# Altium PCB PCB.PcbDoc (part 8 of 11)
Units mm, origin at the board's own origin, x right, y up, seen from the top; angles counter-clockwise.
Board outline 100.46 x 70.51 mm, 10 copper layers (L1(SIG), L2(GND), L3(PWR), L4(SIG), L5(GND), L6(SIG), L7(GND), L8(SIG), L9(GND), L10(SIG)), stack 1.49 mm thick; 425 components, 324 nets, 2004 pads, 1425 vias.
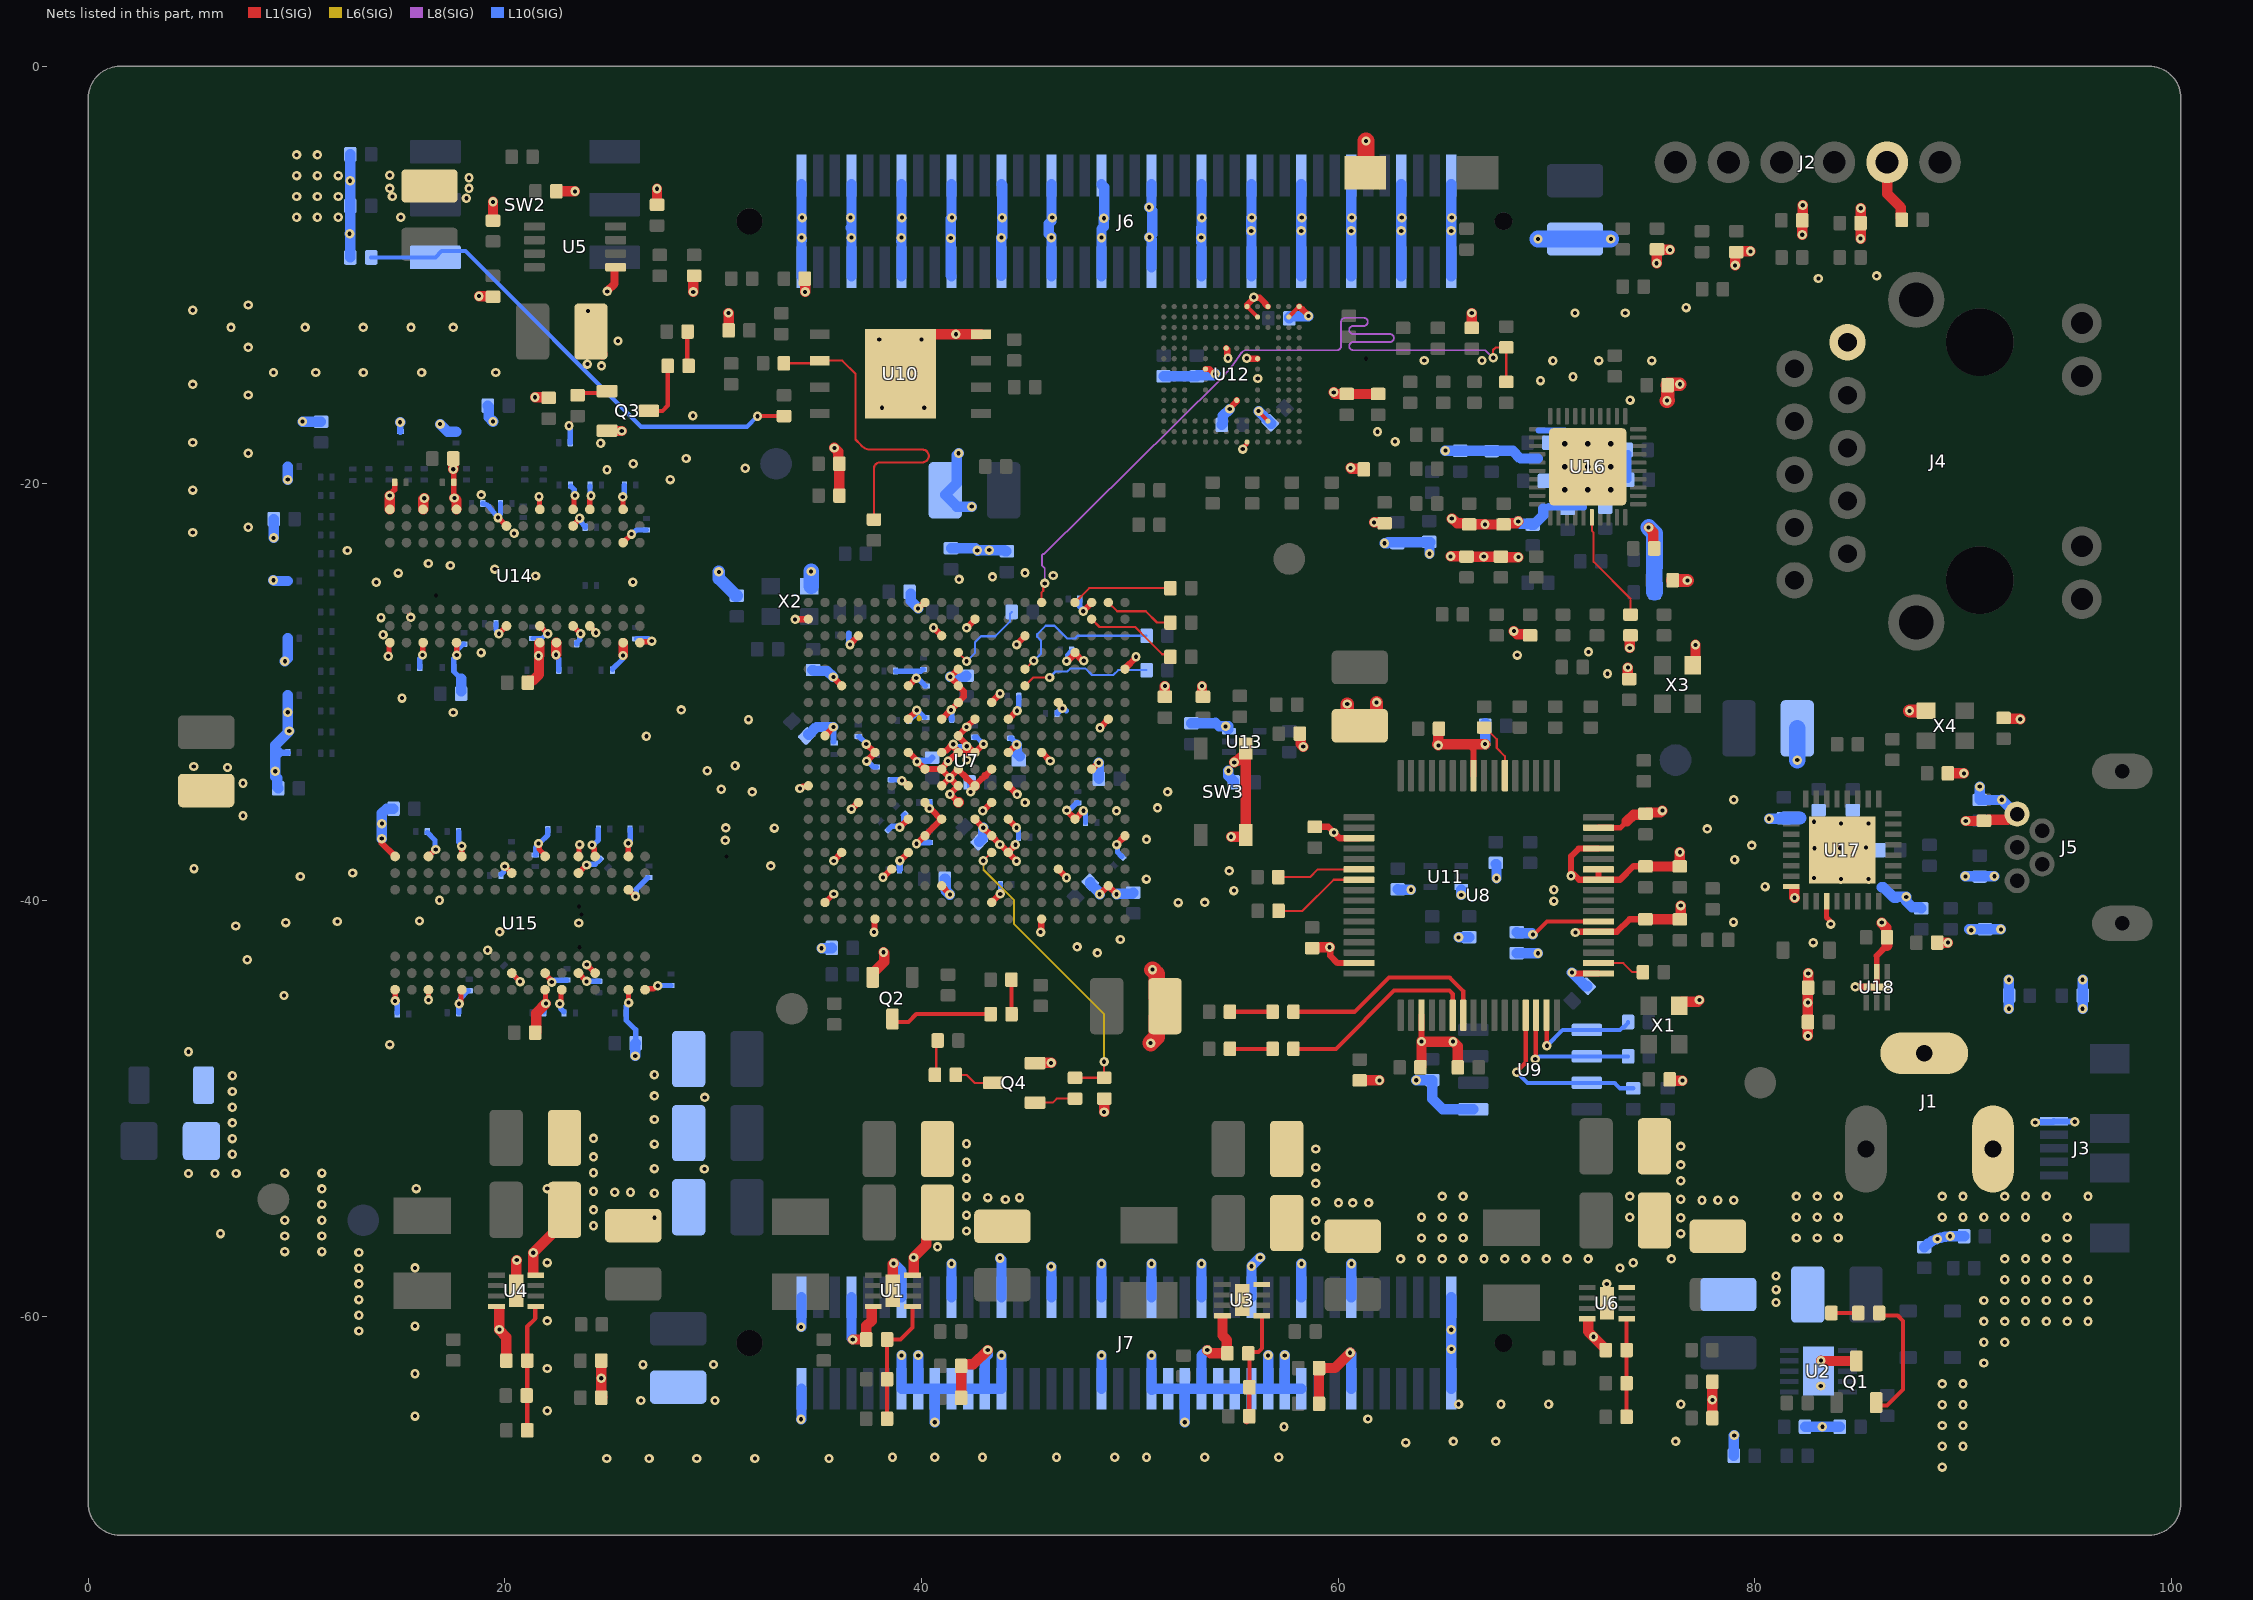
[diagram p15: the nets of this part, all layers, seen from the top]

## Via types
v1: diameter 0.45, hole 0.2, L1(SIG) to L10(SIG), tented both sides, 1194 vias
v2: diameter 0.45, hole 0.2, L1(SIG) to L10(SIG), 211 vias
v3: diameter 0.6, hole 0.25, L1(SIG) to L10(SIG), 9 vias
v4: diameter 0, hole 0.2, L1(SIG) to L10(SIG), tented both sides, 6 vias
v5: diameter 5, hole 3.2, L1(SIG) to L10(SIG), tented both sides, 4 vias
v6: diameter 0.45/0.45/0.45/0.45/0.45/0.45/0.45/0.45/0.45/0.45 (per signal layer), hole 0.2, L1(SIG) to L10(SIG), tented both sides, 1 vias

## Nets (pads, with @x,y where several pads share a name; then routed paths per layer and width w, separated by ;. In a path a pad name is that pad's centre, name@x,y a point inside that pad or via, vN(x,y) a via of type N, cw(c..) or ccw(c..) an arc to the next point about the centre after c; other vN are vias at no path point) (continued)
ETH_RXD3: R132.1 R136.2 U7.A15 | length 39.4
  L1(SIG) w0.103: U7.A15@45.77,-25.71 45.77,-25.224 45.849,-25.145 45.849,-24.859 v1(45.915,-24.793) ; v1(67.447,-13.962) 67.437,-13.952 67.437,-13.593 67.564,-13.466 R132.1@68.072,-13.466 R136.2@68.072,-15.125
  L8(SIG) w0.088: v1(45.915,-24.793) 45.915,-24.067 45.79,-23.942 45.79,-23.429 45.842,-23.377 45.852,-23.377 45.889,-23.377 54.362,-14.998 ccw(c54.102,-14.736) 54.382,-14.976 54.94,-14.326 54.945,-14.32 55.314,-13.778 cw(c55.619,-13.986) 55.381,-13.703 55.506,-13.598 59.907,-13.598 59.951,-13.598 ccw(c59.951,-13.404) 60.145,-13.404 60.145,-12.239 cw(c60.339,-12.239) 60.339,-12.045 61.233,-12.045 cw(c61.233,-12.239) 61.427,-12.239 cw(c61.233,-12.239) 61.233,-12.433 60.727,-12.433 ccw(c60.727,-12.627) 60.533,-12.627 ccw(c60.727,-12.627) 60.727,-12.821 62.484,-12.821 cw(c62.484,-13.016) 62.678,-13.016 cw(c62.484,-13.016) 62.484,-13.21 60.727,-13.21 ccw(c60.727,-13.404) 60.533,-13.404 ccw(c60.727,-13.404) 60.727,-13.598 63.971,-13.598 67.061,-13.598 67.425,-13.962 v1(67.447,-13.962)
ETH_TXCLK: R79.2 U7.A19 | length 3.4
  L1(SIG) w0.103: U7.A19@48.97,-25.71 49.393,-26.133 50.767,-26.133 51.308,-26.674 R79.2@51.951,-26.674
ETH_TXCLT: R85.2 U7.F14 | length 6.4
  L1(SIG) w0.103: U7.F14@44.97,-29.71 44.973,-29.71 45.371,-29.312 v1(46.15,-29.312)
  L10(SIG) w0.103: v1(46.15,-29.312) 46.435,-29.027 47.001,-29.027 47.142,-28.886 47.881,-28.886 48.184,-29.189 49.21,-29.189 49.439,-28.96 R85.2@50.808,-28.96
ETH_TXD0: R80.2 U7.E14 | length 7.8
  L1(SIG) w0.103: U7.E14@44.97,-28.91 44.981,-28.91 45.381,-28.51 v1(45.393,-28.51)
  L10(SIG) w0.103: v1(45.393,-28.51) 45.736,-28.166 45.736,-27.541 45.556,-27.361 45.556,-27.236 45.964,-26.828 46.389,-26.828 46.997,-27.436 47.367,-27.436 47.495,-27.309 R80.2@50.808,-27.309
ETH_TXD1: R81.2 U7.B18 | length 4.5
  L1(SIG) w0.103: U7.B18@48.17,-26.51 48.547,-26.886 50.26,-26.886 50.546,-27.172 50.546,-27.182 51.556,-28.192 51.818,-28.192 R81.2@51.951,-28.325
ETH_TXD2: R83.2 U7.D10 | length 4.2
  L1(SIG) w0.103: U7.D10@41.77,-28.11 41.77,-28.121 42.17,-28.521 v1(42.17,-28.532)
  L10(SIG) w0.103: v1(42.17,-28.532) 42.578,-28.124 42.578,-27.611 42.861,-27.328 43.54,-27.328 44.258,-26.61 44.258,-26.243 R83.2@44.336,-26.166
ETH_TXD3: R84.2 U7.A17 | length 4.9
  L1(SIG) w0.103: U7.A17@47.37,-25.71 48.057,-25.023 R84.2@51.951,-25.023
ETH_XTAL_IN: R147.1 U16.36 | length 5.7
  L1(SIG) w0.1: U16.36@72.186,-21.92 U16.36@72.186,-21.62 72.186,-22.274 72.267,-22.356 72.267,-23.76 74.039,-25.531 R147.1@74.039,-26.292
FB_1V0: C2.1 R2.1 R4.2 U1.1 | length 6.3
  L1(SIG) w0.2: R2.1@38.346,-64.951 R4.2@38.346,-61.091 38.989,-61.091 39.57,-60.509 U1.1@39.57,-59.504
FB_1V8: C11.1 R10.1 R12.2 U3.1 | length 5.7
  L1(SIG) w0.2: R10.1@55.618,-65.076 R10.1@55.618,-64.774 ; R12.2@55.689,-61.756 55.758,-61.687 56.172,-61.687 56.344,-61.516 U3.1@56.344,-59.949 ; R10.1@55.737,-64.774 C11.1@55.737,-63.385 ; C11.1@55.745,-63.377 R12.2@55.745,-61.726
FB_1V35: C16.1 R15.1 R18.2 U4.1 | length 6.1
  L1(SIG) w0.2: C16.1@21.074,-65.45 21.074,-60.464 21.463,-60.075 21.463,-59.528 U4.1@21.487,-59.504
FB_3V3: C27.1 R23.1 R27.2 U6.1 | length 4.7
  L1(SIG) w0.2: C27.1@73.849,-64.807 73.849,-60.105 U6.1@73.857,-60.097
FET_PL_Gate: Q4.G R99.1 | length 2
  L1(SIG) w0.1: Q4.G@45.45,-49.722 46.294,-49.722 46.49,-49.526 R99.1@47.371,-49.526
FET_PS_Gate: Q3.G R82.1 | length 1.5
  L1(SIG) w0.2: R82.1@23.495,-15.76 23.593,-15.662 24.81,-15.662 Q3.G@24.908,-15.564
FLASH_CLK_M4: R59.1 R74.1 U10.6 | length 16.4
  L1(SIG) w0.103: R59.1@33.52,-14.101 R59.1@33.393,-14.228 34.992,-14.228 U10.6@35.119,-14.101 36.195,-14.101 36.83,-14.736 36.83,-17.887 37.109,-18.166 37.161,-18.218 37.162,-18.219 ccw(c37.529,-17.849) 37.164,-18.221 ccw(c37.53,-17.849) 37.53,-18.371 40.049,-18.371 cw(c40.049,-18.677) 40.354,-18.677 cw(c40.049,-18.677) 40.049,-18.982 38.025,-18.982 ccw(c38.025,-19.288) 37.719,-19.288 37.719,-21.448 R74.1@37.719,-21.729
FTDI_BDBUS0: R47.1 U8.38 | length 4
  L1(SIG) w0.1: R47.1@57.134,-38.892 58.659,-38.892 59.028,-38.523 U8.38@61.006,-38.523
FTDI_BDBUS1: R49.1 U8.39 | length 4.5
  L1(SIG) w0.1: R49.1@57.142,-40.517 58.293,-40.517 59.787,-39.023 U8.39@61.006,-39.023
FTDI_BDBUS5: R44.1 U8.22 | length 2.8
  L1(SIG) w0.1: R44.1@67.01,-31.712 67.06,-31.712 67.617,-32.269 67.617,-32.695 68.006,-33.084 U8.22@68.006,-34.023
FTDI_EECLK: R54.1 U8.62 U9.2 | length 6.6
  L1(SIG) w0.2: v1(69.469,-47.629) 69.487,-47.61 69.487,-45.541 U8.62@69.506,-45.523
  L10(SIG) w0.2: v1(69.469,-47.629) 69.537,-47.629 69.664,-47.502 U9.2@71.94,-47.502 R54.1@73.922,-47.502
FTDI_EECS: R55.1 U8.63 U9.1 | length 5.9
  L1(SIG) w0.2: U8.63@70.006,-45.523 70.016,-45.533 70.016,-46.979 v1(70.026,-46.989)
  L10(SIG) w0.2: v1(70.026,-46.989) 70.783,-46.232 U9.1@71.94,-46.232 73.541,-46.232 73.672,-46.101 73.722,-46.101 73.922,-45.901 R55.1@73.922,-45.851
FTDI_EEDATA: R53.1 U8.61 U9.3 | length 8.8
  L1(SIG) w0.2: v1(68.58,-48.264) 68.58,-48.231 69.006,-47.806 U8.61@69.006,-45.523
  L10(SIG) w0.2: v1(68.58,-48.264) 69.088,-48.772 U9.3@71.94,-48.772 73.279,-48.772 73.541,-49.034 R53.1@74.168,-49.034
FTDI_OSCI: R62.2 U8.2 | length 2.5
  L1(SIG) w0.1: U8.2@72.506,-43.023 73.689,-43.023 74.122,-43.456 R62.2@74.517,-43.456 ; R62.2@74.517,-43.583 74.765,-43.335 R62.2@74.765,-43.329
FTDI_REF: R48.2 U8.6 | length 4.2
  L1(SIG) w0.2: v1(69.353,-41.648) 69.407,-41.648 70.032,-41.023 U8.6@72.506,-41.023
  L10(SIG) w0.5: R48.2@68.58,-41.541 68.63,-41.591 69.296,-41.591 v1(69.353,-41.648)
FTDI_RX_LED_A: D11.A R52.2 | length 2
  L1(SIG) w0.2: R52.2@54.81,-47.139 D11.A@56.858,-47.139
FTDI_RX_LED_K: D11.K U8.54 | length 9.9
  L1(SIG) w0.2: D11.K@57.858,-47.139 59.898,-47.139 62.692,-44.345 65.345,-44.345 65.506,-44.505 U8.54@65.506,-45.523
FTDI_TX_LED_A: D12.A R51.2 | length 2.1
  L1(SIG) w0.2: R51.2@54.81,-45.361 D12.A@56.866,-45.361
FTDI_TX_LED_K: D12.K U8.55 | length 10.3
  L1(SIG) w0.2: D12.K@57.866,-45.361 60.787,-45.361 62.438,-43.71 65.359,-43.71 66.006,-44.357 U8.55@66.006,-45.523
GND: C1.1 C3.1 C4.1 C5.1 C6.1 C7.1 C8.1 C9.1 C10.1 C12.1 C13.1 C14.1 C15.1 C17.1 C18.1 C19.1 C20.1 C21.1 C22.1 C23.1 C24.1 C25.1 C26.1 C28.1 C29.1 C30.1 C31.2 C32.1 C33.1 C34.1 C35.1 C36.1 C37.1 C38.1 C39.1 C40.1 C41.1 C42.1 C43.1 C44.1 C45.1 C46.1 C47.1 C48.1 C49.1 C50.1 C51.1 C52.1 C53.1 C54.1 C55.1 C56.1 C57.1 C58.1 C59.1 C60.1 C61.1 C62.1 C63.1 C64.1 C65.1 C66.1 C67.1 C68.1 C69.1 C70.1 C71.1 C72.1 C73.1 C74.1 C75.1 C76.1 C77.1 C78.1 C79.1 C80.1 C81.1 C82.1 C83.1 C84.1 C85.1 C86.1 C87.1 C88.1 C89.1 C90.1 C91.1 C92.1 C93.1 C94.1 C95.1 C96.1 C97.1 C98.1 C99.2 C100.1 C101.2 C102.2 C103.2 C104.2 C105.2 C106.2 C107.2 C108.2 C109.2 C110.1 C111.2 C112.2 C113.1 C114.1 C115.1 C116.1 C117.1 C118.1 C119.1 C120.1 C121.1 C122.1 C123.1 C124.1 C125.1 C126.1 C128.1 C129.1 C130.1 C131.1 C132.1 C133.1 C134.1 C135.1 C136.1 C137.1 C138.1 C139.1 C140.1 C141.1 C142.1 C143.1 C144.1 C145.1 C146.1 C147.1 C148.1 C150.1 C151.1 C152.1 C153.1 C154.1 C155.1 C156.1 C157.1 C158.1 C159.1 C160.1 C161.1 C162.1 C163.1 C164.1 C165.1 C166.1 C167.1 C168.1 C169.1 C170.1 C171.1 C172.1 C173.1 C174.1 C175.1 C176.1 C177.1 C178.1 C179.1 C180.1 C181.1 C182.1 C183.1 C184.1 C185.1 C186.1 C187.1 C188.1 C189.1 C190.1 C191.1 C192.1 C193.1 C194.1 C195.1 C196.1 C197.1 C198.1 C199.1 D3.A D4.A D5.A D6.A D9.A D10.A D16.A D17.A D18.A J1.2 J1.3 J2.5 J3.5 J4.10 J5.5 J6.1 J6.2 J6.7 J6.8 J6.13 J6.14 J6.19 J6.20 J6.25 J6.26 J6.31 J6.32 J6.37 J6.38 J6.43 J6.44 J6.49 J6.50 J6.55 J6.56 J6.61 J6.62 J6.67 J6.68 J6.73 J6.74 J6.79 J6.80 J7.1 J7.2 J7.13 J7.14 J7.19 J7.20 J7.22 J7.24 J7.25 J7.26 J7.28 J7.30 J7.31 J7.32 J7.34 J7.36 J7.37 J7.38 J7.43 J7.44 J7.49 J7.55 J7.56 J7.58 J7.60 J7.61 J7.62 J7.64 J7.66 J7.67 J7.68 J7.73 J7.79 J7.80 Q1.D Q2.S Q3.S Q4.S R4.1 R6.1 R8.1 R12.1 R13.1 R18.1 R19.1 R21.1 R27.1 R28.2 R29.1 R46.1 R48.1 R60.2 R61.2 R66.2 R67.2 R68.2 R75.1 R76.1 R92.2 R96.2 R100.2 R125.2 R127.2 R128.2 R139.1 R140.1 R141.1 R147.2 R150.2 R151.2 R155.2 R157.2 R158.2 R159.2 SW1.2 SW3.12 U1.4 U1.8 U1.9 U2.11 U3.4 U3.8 U3.9 U4.4 U4.8 U4.9 U5.1 U6.4 U6.8 U6.9 U7.A8 U7.A18 U7.B1 U7.B11 U7.C4 U7.C9 U7.C14 U7.D17 U7.E10 U7.E20 U7.F3 U7.F7 U7.F10 U7.G10 U7.G12 U7.G16 U7.H7 U7.H9 U7.H11 U7.H13 U7.H19 U7.J2 U7.J10 U7.K5 U7.K7 U7.K9 U7.K10 U7.K11 U7.K13 U7.K15 U7.L8 U7.L9 U7.L10 U7.L12 U7.L18 U7.M1 U7.M7 U7.M9 U7.M10 U7.M11 U7.M13 U7.N4 U7.N8 U7.N10 U7.N12 U7.N14 U7.P7 U7.P9 U7.P11 U7.P13 U7.P17 U7.R8 U7.R12 U7.R20 U7.T3 U7.T7 U7.T13 U7.U6 U7.U16 U7.V9 U7.V19 U7.W2 U7.W12 U7.Y5 U7.Y15 U8.1 U8.5 U8.10 U8.11 U8.13 U8.15 U8.25 U8.35 U8.47 U8.51 U9.5 U10.4 U10.9 U11.3 U12.A6 U12.C4 U12.E7 U12.G5 U12.H10 U12.J5 U12.K8 U12.N2 U12.N5 U12.P1 U12.P4 U12.P6 U13.3 U14.A9 U14.B1 U14.B3 U14.B9 U14.D1 U14.D8 U14.E1 U14.E2 U14.E8 U14.F9 U14.G1 U14.G8 U14.G9 U14.J2 U14.J8 U14.M1 U14.M9 U14.P1 U14.P9 U14.T1 U14.T9 U15.A9 U15.B1 U15.B3 U15.B9 U15.D1 U15.D8 U15.E1 U15.E2 U15.E8 U15.F9 U15.G1 U15.G8 U15.G9 U15.J2 U15.J8 U15.M1 U15.M9 U15.P1 U15.P9 U15.T1 U15.T9 U16.41 U17.8 U17.11 U17.33 U18.5 U18.7 X1.2 X2.2 X3.2 X4.2 | length 492.3
  L1(SIG) w0.2: v1(55.424,-18.35) 55.424,-18.293 55.624,-18.092 55.624,-18.015 U12.A6@55.634,-18.006 ; U12.P6@55.634,-11.506 U12.N5@56.134,-12.006 ; v1(56.184,-16.523) 56.184,-16.542 56.634,-16.992 U12.C4@56.634,-17.006 ; U12.N2@57.634,-12.006 U12.P1@58.134,-11.506
  L1(SIG) w0.254: v1(14.4,-28.294) 14.438,-28.257 14.438,-27.68 U14.T9@14.479,-27.639 ; v1(14.478,-20.578) 14.478,-20.525 14.709,-20.294 C136.1@14.709,-19.991 ; U15.T1@14.692,-37.859 U15.T1@14.733,-37.901 ; v1@14.733,-44.834 U15.T9@14.733,-44.301 ; v1(16.049,-28.23) 16.064,-28.216 16.064,-27.653 U14.P9@16.079,-27.639 ; v1(16.333,-44.789) U15.P9@16.333,-44.301 ; U15.P1@16.333,-37.901 16.341,-37.901 16.676,-37.566 v1(16.684,-37.566) ; v1(17.526,-19.314) 17.547,-19.335 C132.1@17.547,-19.943 17.547,-20.664 v1(17.578,-20.694) ; U14.M9@17.679,-27.639 17.686,-27.646 17.686,-28.23 v1(17.693,-28.237) ; v1(17.805,-44.971) 17.805,-44.918 17.892,-44.832 17.892,-44.342 U15.M9@17.933,-44.301 ; U15.M1@17.934,-37.9 v1(17.934,-37.406) ; v1(19.671,-21.639) 19.675,-21.639 20.075,-22.039 U14.J2@20.079,-22.039 ; v1(19.716,-27.212) 19.716,-27.207 20.079,-26.844 U14.J8@20.079,-26.839 ; v1(19.993,-38.381) 20.003,-38.381 20.323,-38.701 U15.J2@20.333,-38.701 ; U15.J8@20.333,-43.501 20.333,-43.505 20.733,-43.905 v1(20.733,-43.909) ; v1(21.615,-37.28) 21.653,-37.317 21.653,-37.562 21.933,-37.842 U15.G1@21.933,-37.901 ; v1(21.642,-20.63) 21.661,-20.648 21.661,-21.22 U14.G1@21.679,-21.239 ; U14.G9@21.647,-27.671 U14.G9@21.679,-27.639 ; U14.G8@21.679,-26.839 21.684,-26.839 22.055,-27.21 v1(22.06,-27.21) ; U15.G9@21.933,-44.301 21.952,-44.32 21.952,-44.943 v1(21.971,-44.962) ; U15.G8@21.933,-43.501 21.933,-43.559 22.216,-43.842 22.216,-43.897 v1(22.253,-43.935) ; v1(22.457,-28.218) v1@22.468,-28.207 ; U14.F9@22.468,-27.65 U14.F9@22.479,-27.639 ; v1(22.635,-44.971) 22.635,-44.918 22.692,-44.862 22.692,-44.342 U15.F9@22.733,-44.301 ; U14.E8@23.279,-26.839 23.279,-26.844 23.639,-27.204 v1(23.639,-27.21) ; U14.E2@23.279,-22.039 23.279,-22.006 23.589,-21.696 v1(23.589,-21.663) ; U14.E1@23.279,-21.239 23.32,-21.197 23.32,-20.677 23.37,-20.627 v1(23.37,-20.574) ; U15.E8@23.533,-43.501 23.533,-43.505 23.926,-43.898 v1(23.926,-43.902) ; U15.E2@23.534,-38.701 v1(23.924,-38.311) ; U15.E1@23.533,-37.901 23.562,-37.872 23.562,-37.363 v1(23.591,-37.334) ; v1(23.929,-43.097) U15.D8@24.333,-43.501 ; U14.D8@24.079,-26.839 24.079,-26.854 24.371,-27.146 v1(24.371,-27.161) ; U14.D1@24.079,-21.239 24.079,-20.693 24.135,-20.637 v1(24.135,-20.584) ; v1(24.181,-37.353) 24.181,-37.406 24.292,-37.517 24.292,-37.859 U15.D1@24.333,-37.901 ; v1(25.664,-20.64) 25.671,-20.648 25.671,-21.231 U14.B1@25.679,-21.239 ; v1(25.675,-28.255) v1@25.677,-28.253 ; U14.B9@25.677,-27.641 U14.B9@25.679,-27.639 ; U14.B3@25.679,-22.839 25.679,-22.835 26.079,-22.435 v1(26.079,-22.431) ; v1(25.923,-37.269) 25.928,-37.274 25.928,-37.896 U15.B1@25.933,-37.901 ; U15.B9@25.933,-44.301 25.938,-44.306 25.938,-44.912 v1(25.943,-44.917) ; U15.B3@25.933,-39.501 25.943,-39.501 26.264,-39.821 v1(26.274,-39.821) ; U14.A9@26.479,-27.639 26.517,-27.6 27.013,-27.6 v1(27.051,-27.563) ; U15.A9@26.733,-44.301 26.774,-44.259 27.14,-44.259 27.29,-44.11 v1(27.343,-44.11) ; U7.W2@35.37,-40.11 35.378,-40.11 35.781,-39.707 v1(35.789,-39.707) ; U8.15@73.106,-36.523 73.562,-36.523 73.868,-36.217 ; U17.33@82.844,-38.953 v1(82.844,-38.936) ; U17.11@83.451,-40.046 83.451,-40.827 83.615,-40.991 83.615,-41.113 v1(83.653,-41.15) ; U17.33@83.451,-38.346 U17.33@84.201,-37.596 ; U18.7@85.86,-44.178 U18.5@85.86,-43.438 85.86,-42.668
  L1(SIG) w0.3: v1(33.936,-26.52) 33.941,-26.515 34.565,-26.515 U7.B1@34.57,-26.51 ; v1(34.164,-34.638) 34.205,-34.638 34.304,-34.538 34.541,-34.538 U7.M1@34.57,-34.51 ; U7.J2@35.37,-32.11 35.37,-32.098 35.77,-31.698 v1(35.77,-31.687) ; v1(35.77,-29.287) 35.77,-29.298 U7.F3@36.17,-29.698 ; v1(35.786,-38.116) 35.786,-38.105 36.179,-37.711 U7.T3@36.179,-37.71 ; v1(36.57,-27.732) 36.57,-27.721 36.974,-27.317 U7.C4@36.974,-27.298 ; v1(36.634,-35.632) 36.641,-35.632 36.959,-35.314 U7.N4@36.959,-35.31 ; v1(37.347,-32.51) 37.359,-32.51 37.759,-32.91 U7.K5@37.77,-32.91 ; v1(37.365,-33.327) 37.365,-33.321 37.727,-32.959 U7.K5@37.727,-32.908 ; v1(37.719,-41.533) 37.745,-41.507 37.745,-40.935 U7.Y5@37.77,-40.91 ; v1@38.163,-38.905 U7.U6@38.559,-38.51 ; v1(38.964,-38.104) 38.97,-38.104 39.359,-37.715 U7.T7@39.359,-37.71 ; v1@38.963,-36.505 U7.P7@39.359,-36.11 ; v1(39.06,-34.26) 39.091,-34.26 39.34,-34.51 U7.M7@39.381,-34.51 ; U7.H7@39.345,-31.31 U7.H7@39.37,-31.31 ; U7.K7@39.37,-32.91 39.381,-32.91 39.763,-33.292 v1@39.775,-33.292 ; U7.H7@39.37,-31.295 39.374,-31.295 39.77,-30.898 v1(39.77,-30.887) ; U7.F7@39.37,-29.698 39.387,-29.698 39.745,-29.341 v1(39.751,-29.341) ; v1(39.763,-37.294) U7.R8@40.159,-36.898 ; v1@39.775,-33.303 v1@39.802,-33.331 ; v1(39.785,-33.348) 39.797,-33.348 40.147,-33.698 U7.L8@40.17,-33.698 ; v1(39.841,-25.994) 39.863,-25.994 40.14,-25.717 U7.A8@40.159,-25.717 ; U7.R8@40.17,-36.91 40.17,-36.898 40.552,-36.516 40.552,-36.505 ; U7.N8@40.17,-35.31 40.17,-35.35 40.35,-35.53 40.35,-35.572 v1(40.379,-35.601) ; U7.L8@40.17,-33.71 U7.L9@40.97,-33.71 ; v1@40.414,-35.566 40.414,-35.595 v1@40.485,-35.666 ; v1@40.486,-35.666 40.929,-36.11 U7.P9@40.959,-36.11 ; 40.563,-36.505 U7.P9@40.959,-36.11 ; v1(40.58,-26.926) 40.583,-26.926 40.967,-27.31 U7.C9@40.97,-27.31 ; U7.V9@40.97,-39.321 v1@41.365,-39.716 ; U7.P9@40.97,-36.11 U7.P9@40.959,-36.11 ; U7.M9@40.97,-34.51 v1(41.35,-34.13) ; U7.K9@40.97,-32.91 41.011,-32.91 41.076,-32.845 41.159,-32.845 41.488,-32.516 v1(41.529,-32.516) ; U7.H9@40.97,-31.31 40.974,-31.31 41.42,-30.864 v1(41.424,-30.864) ; v1@41.245,-33.326 41.245,-33.302 v1@41.274,-33.273 ; v1(41.274,-33.326) 41.274,-33.366 40.97,-33.67 U7.L9@40.97,-33.71 ; v1@41.323,-33.264 41.343,-33.244 41.395,-33.244 41.741,-32.898 41.741,-32.84 41.558,-32.657 41.558,-32.585 41.557,-32.584 v1@41.529,-32.584 ; v1(41.365,-34.919) 41.365,-34.916 41.77,-34.512 U7.M10@41.77,-34.51 41.729,-34.51 v1(41.35,-34.13) ; v1@41.377,-34.914 U7.N10@41.759,-35.296 ; v1(41.38,-29.276) 41.392,-29.276 41.758,-28.91 U7.E10@41.77,-28.91 ; v1@41.416,-30.856 41.427,-30.856 41.77,-30.514 U7.G10@41.77,-30.51 41.77,-30.497 42.036,-30.231 42.036,-29.976 U7.F10@41.77,-29.71 41.77,-29.669 41.442,-29.341 v1@41.442,-29.245 ; U7.K10@41.77,-32.91 U7.K11@42.529,-32.91 ; U7.J10@41.77,-32.11 41.77,-32.098 v1@42.181,-31.687 ; U7.J10@41.782,-32.122 41.782,-32.162 42.142,-32.522 42.142,-32.583 v1(42.17,-32.611) ; v1(42.17,-31.687) v1@42.181,-31.687 ; v1(42.17,-26.932) 42.17,-26.921 42.579,-26.512 U7.B11@42.579,-26.51 ; v1@42.199,-32.636 42.256,-32.636 U7.K11@42.529,-32.91 ; v1@42.207,-31.645 v1@42.207,-31.661 ; U7.M11@42.546,-34.51 42.539,-34.51 42.196,-34.167 42.164,-34.167 42.164,-34.135 41.77,-33.741 U7.L10@41.77,-33.71 v1(41.35,-34.13) ; U7.P11@42.564,-36.115 v1@42.965,-36.516 ; U7.K11@42.57,-32.91 U7.K11@42.529,-32.91 ; U7.H11@42.57,-31.31 42.559,-31.31 v1@42.207,-31.661 ; U7.K11@42.576,-32.91 42.976,-32.51 v1(42.981,-32.51) ; 42.769,-34.293 42.897,-34.165 42.919,-34.165 43.044,-34.04 43.084,-34.04 ; v1(42.945,-35.711) 42.957,-35.711 43.348,-35.321 U7.N12@43.37,-35.321 ; v1@42.975,-36.514 U7.R12@43.37,-36.91 ; 43.035,-33.991 43.111,-33.991 43.37,-33.732 U7.L12@43.37,-33.71 ; U7.W12@43.37,-40.11 v1(43.781,-39.699) ; U7.R12@43.37,-36.921 v1@43.765,-37.316 ; U7.G12@43.381,-30.51 43.381,-30.487 43.77,-30.098 v1(43.77,-30.087) ; v1@43.775,-37.314 U7.T13@44.17,-37.71 ; U7.P13@44.17,-36.121 v1@44.565,-36.516 ; U7.M13@44.17,-34.521 44.184,-34.521 44.588,-34.925 v1(44.59,-34.925) ; U7.K13@44.181,-32.91 44.559,-32.532 v1(44.57,-32.532) ; U7.H13@44.181,-31.31 44.581,-30.91 v1(44.593,-30.91) ; v1(44.51,-37.342) 44.51,-37.356 44.175,-37.69 44.175,-37.726 44.554,-38.105 v1@44.565,-38.105 ; v1(44.57,-27.732) 44.57,-27.721 U7.C14@44.976,-27.315 ; U7.N14@44.97,-35.321 v1(44.975,-35.315) ; v1(45.72,-41.533) 45.745,-41.508 45.745,-40.935 U7.Y15@45.77,-40.91 ; U7.K15@45.77,-32.91 v1(46.181,-33.321) ; U7.U16@46.57,-38.521 v1@46.965,-38.916 ; U7.G16@46.577,-30.51 46.577,-30.557 46.739,-30.719 46.739,-30.768 v1(46.768,-30.796) ; v1(46.97,-28.526) 47.011,-28.526 47.305,-28.231 47.445,-28.231 47.695,-28.481 47.764,-28.481 v1(47.793,-28.51) ; v1@46.974,-35.702 U7.P17@47.37,-36.099 ; U7.P17@47.37,-36.11 47.373,-36.11 47.77,-35.712 v1(47.773,-35.712) ; v1(47.77,-26.132) 47.77,-26.121 U7.A18@48.17,-25.721 ; U7.L18@48.181,-33.71 48.189,-33.71 48.494,-33.404 v1(48.513,-33.404) ; v1(48.553,-39.715) 48.559,-39.715 48.964,-39.31 U7.V19@48.97,-39.31 ; v1(48.57,-31.732) 48.57,-31.721 48.97,-31.321 U7.H19@48.97,-31.31 ; U7.V19@48.97,-39.321 v1(49.365,-39.716) ; v1(49.37,-37.332) 49.37,-37.321 U7.R20@49.77,-36.921 ; U7.E20@49.77,-28.91 49.77,-28.879 50.302,-28.347 v1(50.302,-28.316) ; U12.H10@53.634,-14.506 53.831,-14.506 54.061,-14.736 v1(54.102,-14.736) ; U12.K8@54.634,-13.506 54.685,-13.557 54.685,-13.957 v1(54.714,-13.986) ; v1(54.803,-16.423) 54.803,-16.382 55.134,-16.051 U12.E7@55.134,-16.006 ; v1(55.619,-13.986) 55.639,-14.006 U12.J5@56.134,-14.006 ; U12.P6@55.634,-11.506 55.634,-11.417 55.951,-11.1 v1(55.951,-11.06) ; v1@55.953,-11.06 55.953,-11.057 55.982,-11.086 56.244,-11.086 56.509,-11.35 56.509,-11.381 U12.P4@56.634,-11.506 ; U12.G5@56.134,-15.006 56.143,-14.996 v1(56.143,-14.956) ; U12.P1@58.134,-11.506 58.259,-11.631 58.289,-11.631 58.581,-11.923 v1@58.581,-11.953 ; C84.1@58.882,-36.479 59.525,-36.479 60.069,-37.023 U8.35@61.006,-37.023 ; v1(59.592,-42.259) 59.621,-42.288 59.621,-42.671 59.973,-43.023 U8.47@61.006,-43.023 ; v1(64.006,-46.783) U8.51@64.006,-45.523 ; 66.264,-32.512 66.406,-32.654 66.406,-32.667 66.506,-32.767 U8.25@66.506,-34.023 ; v1(71.185,-38.837) 71.185,-37.884 71.546,-37.523 U8.13@72.506,-37.523 ; v1(71.228,-43.475) 71.282,-43.475 71.33,-43.523 U8.1@72.506,-43.523 ; v1@71.264,-38.757 71.305,-38.757 71.571,-39.023 U8.10@72.506,-39.023 ; v1(71.392,-41.555) 71.424,-41.523 U8.5@72.506,-41.523 73.388,-41.523 73.995,-40.916 C87.1@74.757,-40.916 ; U8.11@72.506,-38.523 U8.10@72.506,-39.023 ; U8.15@72.506,-36.523 U8.15@73.106,-36.523 ; C82.1@74.757,-38.384 74.749,-38.376 74.181,-38.376 73.534,-39.023 U8.10@72.506,-39.023 ; 85.86,-42.668 86.352,-42.176 ; U7.L9@40.97,-33.71 40.97,-33.75 v1(41.35,-34.13) ; v1@42.181,-31.687 v1@42.207,-31.661
  L1(SIG) w0.305: v1@14.097,-37.047 14.097,-37.265 U15.T1@14.692,-37.859
  L1(SIG) w0.33: v1(84.827,-44.165) 84.84,-44.178 85.395,-44.178 U18.7@85.86,-44.178
  L1(SIG) w0.4: v1(24.914,-10.777) 24.914,-10.763 25.262,-10.415 25.262,-9.615 U5.1@25.318,-9.615
  L1(SIG) w0.45: v1@25.677,-28.253 U14.B9@25.677,-27.641
  L1(SIG) w0.5: U14.T1@14.468,-21.228 14.468,-20.587 v1(14.478,-20.578) ; U14.P1@16.079,-21.239 16.079,-20.755 v1(16.129,-20.705) ; C139.1@17.518,-18.8 17.526,-18.808 v1(17.526,-19.314) ; v1(17.578,-20.694) 17.679,-20.796 U14.M1@17.679,-21.239 ; v1(18.758,-11.001) 19.396,-11.001 C23.1@19.431,-11.037 ; C17.1@19.431,-7.378 v1(19.431,-6.481) ; U4.8@19.722,-59.629 19.722,-60.629 20.074,-60.981 R18.1@20.074,-62.107 ; U4.9@20.542,-58.754 20.542,-57.312 v1(20.574,-57.281) ; R128.2@21.107,-29.556 21.107,-29.506 21.157,-29.456 21.347,-29.456 21.64,-29.163 v1@21.64,-28.297 ; U4.4@21.36,-57.879 v1(21.36,-56.925) C18.1@22.677,-55.607 ; v1(21.448,-15.858) 22.069,-15.858 R92.2@22.098,-15.887 ; R159.2@21.455,-46.359 21.505,-46.309 21.505,-45.428 v1(21.971,-44.962) ; v1@21.647,-28.239 U14.G9@21.647,-27.671 ; v1@22.468,-28.207 U14.F9@22.468,-27.65 ; C25.1@22.471,-5.973 v1(23.368,-5.973) ; C22.1@24.133,-12.704 24.133,-13.243 C22.1@24.683,-13.793 ; R19.1@24.63,-62.107 v1(24.63,-62.954) 24.63,-63.801 C20.1@24.68,-63.851 ; Q3.S@24.908,-17.464 24.924,-17.48 v1(25.608,-17.48) ; C24.1@27.305,-6.616 v1(27.305,-5.846) ; v1(29.046,-10.799) 29.046,-10.066 R21.1@29.083,-10.029 ; v1(30.734,-11.815) 30.742,-11.823 R61.2@30.742,-12.65 ; R60.2@34.399,-10.164 34.417,-10.182 v1(34.417,-10.799) ; v1(35.818,-18.292) 36.01,-18.484 36.01,-19.004 C101.2@36.06,-19.054 R125.2@36.06,-20.578 ; v1(36.703,-61.091) R4.1@37.346,-61.091 37.358,-61.079 37.358,-60.436 37.604,-60.19 U1.8@37.604,-59.629 ; Q2.S@37.658,-43.708 37.708,-43.658 37.708,-43.458 38.215,-42.951 38.215,-42.536 v1(38.177,-42.499) ; U1.9@38.625,-58.754 38.625,-57.48 v1(38.665,-57.44) ; U10.9@38.989,-14.736 38.989,-14.286 40.444,-12.831 v1(41.652,-12.831) U10.4@42.859,-12.831 ; U1.4@39.624,-57.879 v1(39.624,-57.154) 40.23,-56.548 40.23,-55.535 C3.1@40.77,-54.995 ; U7.N10@41.77,-35.296 U7.N10@41.77,-35.31 U7.N10@41.783,-35.297 ; R6.1@41.902,-63.885 C5.1@41.902,-62.462 ; C5.1@41.902,-62.335 41.952,-62.285 42.493,-62.285 v1(43.18,-61.599) ; U7.M11@42.557,-34.51 U7.M11@42.57,-34.51 ; Q4.S@45.45,-47.822 45.457,-47.814 v1(46.227,-47.814) ; v1(48.768,-50.169) R100.2@48.768,-49.526 ; v1(51.689,-29.722) C104.2@51.689,-30.238 C104.2@51.789,-30.238 ; v1(53.467,-29.722) 53.467,-30.201 R75.1@53.534,-30.268 ; v1(53.721,-61.599) 53.879,-61.756 R12.1@54.689,-61.756 54.665,-61.732 54.665,-61.114 54.452,-60.901 U3.8@54.452,-60.074 ; v1(54.864,-36.961) 55.483,-36.961 55.558,-36.886 SW3.12@55.558,-36.877 SW3.12@55.558,-32.927 ; v1(55.013,-33.389) 55.083,-33.318 55.166,-33.318 SW3.12@55.558,-32.927 ; SW3.12@55.558,-32.727 SW3.12@55.558,-32.927 ; C102.2@58.158,-32.008 58.208,-32.058 58.208,-32.504 v1(58.331,-32.628) ; C89.1@58.755,-42.305 58.8,-42.259 v1(59.592,-42.259) ; C14.1@59.085,-64.176 R13.1@59.085,-62.462 59.843,-62.462 v1(60.579,-61.726) ; v1(59.795,-15.626) 59.871,-15.702 C112.2@61.921,-15.702 ; v1(60.6,-19.249) 60.633,-19.282 R139.1@61.158,-19.282 ; C96.1@61.041,-48.655 61.985,-48.655 v1(61.986,-48.654) ; v1(61.731,-21.865) 62.188,-21.865 R140.1@62.231,-21.909 ; C90.1@63.954,-48.028 64.004,-47.978 64.004,-46.785 v1(64.006,-46.783) 64.013,-46.791 v1(65.519,-46.791) 65.74,-47.012 C95.1@65.74,-48.02 ; C91.1@64.843,-31.772 64.815,-31.8 v1@64.815,-32.512 ; v1(65.405,-23.499) 66.159,-23.499 C188.1@66.167,-23.507 v1(66.992,-23.507) C187.1@67.818,-23.507 67.843,-23.531 v1(68.655,-23.531) ; v1(65.461,-21.685) 65.49,-21.685 65.722,-21.917 66.244,-21.917 C171.1@66.294,-21.967 66.302,-21.975 66.315,-21.962 v1(67.056,-21.962) ; R141.1@66.421,-12.531 v1(66.421,-11.815) ; v1(67.056,-32.512) 66.264,-32.512 v1@64.815,-32.512 ; v1@67.062,-21.968 67.064,-21.967 67.845,-21.967 67.895,-21.917 68.554,-21.917 v1(68.652,-21.819) ; v1(68.438,-27.084) 68.596,-27.242 69.167,-27.242 R151.2@69.217,-27.292 ; 72.009,-60.27 72.009,-60.709 72.849,-61.549 R27.1@72.849,-61.599 ; 73.868,-36.217 74.191,-35.894 74.792,-35.894 C83.1@74.85,-35.836 ; v1(73.914,-28.833) 73.914,-29.334 73.964,-29.384 C190.1@73.972,-29.384 ; v1(73.999,-27.893) 73.999,-27.332 R147.2@74.039,-27.292 ; C87.1@74.757,-40.916 74.761,-40.92 76.404,-40.92 C88.1@76.408,-40.924 76.454,-40.878 v1(76.454,-40.263) ; C82.1@74.757,-38.384 C81.1@76.408,-38.384 v1(76.408,-37.704) ; C83.1@74.807,-35.836 C83.1@74.85,-35.836 ; v1(74.908,-22.11) 75.126,-22.327 C176.1@75.126,-23.119 ; v1(75.291,-9.427) 75.291,-8.779 D6.A@75.311,-8.759 75.337,-8.785 v1(75.935,-8.785) ; v1(75.568,-35.701) 75.475,-35.794 74.857,-35.794 74.85,-35.801 C83.1@74.85,-35.836 ; C98.1@75.922,-48.605 75.922,-48.613 75.972,-48.663 v1(76.535,-48.663) ; X1.2@76.371,-45.071 76.371,-45.021 76.521,-44.871 77.268,-44.871 v1(77.343,-44.796) ; X3.2@77.024,-28.726 77.159,-28.591 v1(77.159,-27.746) ; R29.1@77.97,-64.86 v1(77.97,-63.991) C30.1@77.97,-63.123 ; v1(79.06,-9.527) 79.06,-8.936 79.138,-8.858 v1(79.801,-8.858) ; v1(82.284,-8.055) 82.284,-7.374 D4.A@82.28,-7.37 82.306,-7.343 v1(82.306,-6.639) ; v1(83.185,-62.107) 83.201,-62.123 Q1.D@84.88,-62.123 ; v1(85.082,-8.243) D5.A@85.082,-7.497 85.091,-7.488 v1(85.091,-6.783) ; J2.5@86.36,-4.576 86.36,-6.1 87.009,-6.748 87.009,-7.238 87.013,-7.243 C86.1@87.109,-7.243 ; R158.2@88.765,-42.041 v1(89.281,-42.041) ; R155.2@89.273,-33.913 v1(90.043,-33.913) ; v1(90.13,-36.2) 91.176,-36.2 91.236,-36.141 92.137,-36.141 92.409,-35.869 J5.5@92.598,-35.869 ; v1@64.815,-32.512 64.757,-32.512 v1(64.815,-32.57) v1@64.815,-32.512
  L1(SIG) w0.508: U17.8@81.897,-39.47 81.897,-39.864 v1(81.915,-39.882) ; v1(82.552,-46.517) 82.552,-45.856 R157.2@82.558,-45.851 ; R157.2@82.563,-45.765 82.552,-45.755 v1(82.552,-44.918) 82.552,-44.186 82.57,-44.168 v1(82.57,-43.517) ; v1(86.102,-41.076) 86.102,-41.113 86.306,-41.317 C198.1@86.306,-41.787 ; 86.352,-42.176 C198.1@86.352,-41.787 ; C197.1@91.948,-31.254 91.994,-31.3 92.737,-31.3 v1(92.751,-31.314)
  L1(SIG) w0.6: C177.1@75.818,-15.278 C177.1@75.818,-15.235
  L1(SIG) w0.635: v1(60.44,-30.584) 60.44,-31.144 60.672,-31.376 C41.1@61.087,-31.376 ; C41.1@61.595,-31.144 61.849,-31.144 v1(61.849,-30.507) ; R150.2@76.065,-24.642 76.077,-24.654 v1(76.77,-24.654) ; v1(87.429,-30.917) 88.214,-30.917 X4.2@88.229,-30.902
  L1(SIG) w0.65: v1@75.818,-15.995 C177.1@75.818,-15.278 ; C177.1@75.818,-15.235 v1(76.409,-15.235)
  L1(SIG) w0.7: v1(75.792,-16.02) v1@75.818,-15.995
  L1(SIG) w0.8: v1(51.003,-46.861) 51.292,-46.572 51.292,-45.613 C51.1@51.562,-45.343 ; v1(51.094,-43.337) 51.292,-43.535 51.292,-44.689 C51.1@51.692,-45.089 ; SW1.2@61.308,-5.08 61.341,-5.047 v1(61.341,-3.556)
  L6(SIG) w0.254: 39.878,-31.242 39.885,-31.249 39.885,-31.291
  L10(SIG) w0.2: C54.1@36.963,-32.141 37.009,-32.141 C54.1@37.013,-32.141
  L10(SIG) w0.203: C137.1@21.336,-27.433 21.359,-27.409 21.795,-27.409 21.993,-27.21 v1(22.06,-27.21)
  L10(SIG) w0.25: v1(41.529,-32.516) 41.583,-32.516 41.712,-32.645 C42.1@41.891,-32.645
  L10(SIG) w0.254: v1(14.732,-44.835) 14.732,-44.888 14.836,-44.992 C156.1@14.836,-45.422 ; C133.1@15.917,-28.833 15.919,-28.831 15.919,-28.414 16.049,-28.284 v1(16.049,-28.23) ; C152.1@16.279,-36.755 16.646,-37.122 16.646,-37.528 v1(16.684,-37.566) ; v1(17.693,-28.237) 17.693,-28.255 17.549,-28.399 17.549,-28.831 C147.1@17.547,-28.833 17.549,-28.835 17.549,-29.019 17.907,-29.377 ; v1@17.694,-28.228 17.715,-28.207 17.715,-27.984 17.988,-27.711 C128.1@18.034,-27.711 ; C168.1@17.78,-45.401 17.782,-45.399 17.782,-44.995 v1(17.805,-44.971) ; C157.1@17.78,-36.707 17.782,-36.709 17.782,-37.2 17.934,-37.352 v1(17.934,-37.406) ; v1@17.843,-44.971 17.843,-44.747 C150.1@18.24,-44.35 ; C131.1@18.944,-20.959 19.157,-21.03 19.239,-21.111 v1@19.67,-21.634 ; C143.1@19.577,-26.728 19.579,-26.73 19.579,-27.023 19.716,-27.159 v1(19.716,-27.212) ; v1(19.671,-21.639) 19.671,-21.586 19.791,-21.465 C145.1@19.791,-20.959 ; C160.1@19.815,-38.769 19.956,-38.628 19.956,-38.419 v1(19.993,-38.381) ; C164.1@20.344,-43.532 20.349,-43.527 20.352,-43.527 v1(20.733,-43.909) ; C162.1@21.463,-37.829 21.474,-37.829 21.476,-37.827 21.476,-37.472 21.615,-37.333 v1(21.615,-37.28) ; C140.1@21.611,-28.96 21.613,-28.958 21.613,-28.273 v1(21.615,-28.271) ; v1@21.698,-37.234 22.063,-36.868 C158.1@22.063,-36.609 ; C155.1@21.867,-45.353 21.867,-45.109 21.971,-45.005 v1(21.971,-44.962) ; v1(22.253,-43.935) 22.306,-43.935 22.401,-43.84 C163.1@22.987,-43.84 ; v1(22.457,-28.218) 22.457,-28.271 22.585,-28.399 C135.1@22.585,-28.96 ; v1(22.635,-44.971) 22.672,-45.009 22.672,-45.202 C170.1@22.837,-45.366 ; v1(23.083,-17.223) 23.083,-17.276 23.135,-17.328 C115.1@23.135,-18.038 ; C142.1@23.158,-20.118 23.333,-20.292 23.333,-20.536 v1(23.37,-20.574) ; C138.1@23.453,-27.69 23.453,-27.644 23.602,-27.495 23.602,-27.247 v1(23.639,-27.21) ; v1(23.589,-21.663) 23.627,-21.701 23.627,-21.827 23.855,-22.056 C141.1@23.855,-22.102 ; v1@23.924,-38.364 v1(23.924,-38.311) 23.962,-38.273 24.341,-38.273 C159.1@24.564,-38.049 ; v1(23.926,-43.902) 23.931,-43.898 24.505,-43.898 C153.1@24.507,-43.896 ; C146.1@24.09,-20.118 24.09,-20.485 24.135,-20.531 v1(24.135,-20.584) ; v1(24.181,-37.353) 24.218,-37.316 24.288,-37.316 24.49,-37.114 C154.1@24.49,-36.58 ; C130.1@25.169,-28.912 25.637,-28.443 25.637,-28.292 v1(25.675,-28.255) ; v1(25.664,-20.64) 25.664,-20.587 25.737,-20.514 25.737,-20.072 C134.1@25.739,-20.07 ; C166.1@25.827,-45.414 C166.1@25.829,-45.412 ; v1(25.923,-37.269) 25.923,-37.216 26.014,-37.125 C167.1@26.014,-36.58 ; v1(25.943,-44.917) 25.943,-44.97 25.829,-45.084 C166.1@25.829,-45.412 ; v1(26.079,-22.431) 26.116,-22.431 26.318,-22.229 C148.1@26.797,-22.229 ; v1(26.274,-39.821) 26.311,-39.784 26.311,-39.474 C165.1@26.876,-38.91 ; C151.1@26.281,-46.867 26.281,-46.224 25.829,-45.771 C166.1@25.829,-45.412 ; C144.1@26.337,-27.457 26.892,-27.457 26.998,-27.563 v1(27.051,-27.563) ; v1(27.343,-44.11) 27.356,-44.097 C169.1@27.973,-44.095 C169.1@27.973,-44.095 ; v1@36.514,-27.676 C56.1@36.514,-27.182 ; C54.1@37.009,-32.141 37.347,-32.48 v1(37.347,-32.51) ; v1(37.365,-33.327) 37.418,-33.327 37.698,-33.607 37.825,-33.607 C66.1@37.827,-33.609 ; C126.1@38.413,-36.604 38.416,-36.604 38.568,-36.453 38.9,-36.453 v1(38.952,-36.505) 39.151,-36.306 39.151,-35.918 C125.1@39.183,-35.885 ; C77.1@38.555,-34.217 38.557,-34.219 38.966,-34.219 39.007,-34.26 v1(39.06,-34.26) ; C57.1@38.763,-29.013 39.748,-29.013 ; v1(39.77,-30.887) 39.813,-30.887 C45.1@40.16,-31.234 ; C53.1@40.094,-28.926 40.048,-28.926 39.961,-29.013 39.748,-29.013 ; C32.1@40.188,-29.717 39.85,-29.378 39.789,-29.378 v1(39.751,-29.341) ; C64.1@42.164,-29.222 C64.1@42.214,-29.222 ; C39.1@42.545,-32.179 42.547,-32.181 42.653,-32.181 v1(42.981,-32.51) ; v1(43.781,-39.699) 43.792,-39.688 43.792,-39.249 C71.1@43.794,-39.247 ; C36.1@44.281,-32.231 44.327,-32.231 44.533,-32.437 44.533,-32.494 v1(44.57,-32.532) ; v1(44.565,-36.527) 44.565,-36.58 44.66,-36.675 44.66,-36.996 C73.1@44.662,-36.998 ; v1(44.593,-30.91) 44.63,-30.872 44.63,-30.734 44.668,-30.695 44.668,-30.327 44.67,-30.326 C63.1@44.67,-30.267 ; C76.1@46.504,-31.035 C76.1@46.504,-30.992 ; v1(46.768,-30.796) 46.805,-30.834 46.877,-30.834 v1@46.953,-30.91 ; v1(46.97,-28.526) 47.008,-28.488 47.008,-28.249 C38.1@47.212,-28.045 ; v1(46.974,-35.691) 47.011,-35.654 47.129,-35.654 47.452,-35.331 C74.1@47.498,-35.331 ; C62.1@47.601,-25.595 47.601,-25.91 47.77,-26.079 v1(47.77,-26.132) ; v1(47.773,-35.712) 47.773,-35.765 47.877,-35.869 47.877,-36.272 C72.1@47.879,-36.274 ; v1(49.37,-37.332) 49.408,-37.37 49.408,-37.695 C70.1@49.611,-37.899 ; 39.748,-29.013 39.748,-29.338 v1(39.751,-29.341) ; 39.748,-29.013 39.751,-29.016 v1(39.751,-29.341)
  L10(SIG) w0.3: v1(35.77,-31.687) 35.777,-31.694 C55.1@35.777,-32.378 ; v1@36.514,-27.676 ccw(c36.57,-27.676) v1(36.57,-27.732) ; v1@37.311,-32.51 v1(37.347,-32.51) ; C75.1@38.951,-38.55 38.957,-38.543 38.957,-38.11 v1(38.964,-38.104) ; C37.1@39.391,-31.373 39.741,-31.022 39.741,-30.916 v1(39.77,-30.887) ; v1(39.763,-37.294) cw(c39.904,-37.434) 39.904,-37.236 C46.1@40.386,-37.236 ; v1(39.785,-33.348) 39.825,-33.348 39.865,-33.309 40.363,-33.309 C49.1@40.513,-33.159 ; v1(40.379,-35.601) 40.386,-35.309 C47.1@40.386,-35.292 ; v1(41.424,-30.864) 41.441,-30.882 41.441,-31.295 C48.1@41.459,-31.312 ; C35.1@42.308,-34.35 42.334,-34.376 42.334,-34.775 v1(42.36,-34.801) ; v1(93.472,-50.677) 93.501,-50.648 94.33,-50.648 J3.5@94.361,-50.617 94.371,-50.627 95.351,-50.627 v1(95.361,-50.637)
  L10(SIG) w0.305: 9.135,-32.917 C117.1@9.583,-32.917 ; v1(14.974,-17.055) 14.982,-17.062 14.982,-17.504 C120.1@14.986,-17.509 ; C76.1@46.532,-31.013 46.748,-30.796 v1(46.768,-30.796) ; 69.624,-17.452 70.894,-17.452 ; 70.104,-21.086 70.152,-21.134 C181.1@70.988,-21.134 ; v3@70.993,-20.324 70.988,-20.329 C181.1@70.988,-21.134 ; 71.803,-21.134 C181.1@70.988,-21.134 ; v3@73.279,-19.181 73.922,-19.181 ; C175.1@73.922,-19.816 73.922,-19.181 ; C174.1@73.922,-18.546 73.922,-19.181
  L10(SIG) w0.5: v1(8.89,-24.642) 8.926,-24.678 C116.1@9.583,-24.678 ; v1(8.898,-22.61) 8.906,-22.602 C123.1@8.906,-21.705 ; C124.1@9.115,-34.635 9.065,-34.585 9.065,-34.157 8.975,-34.068 v1(8.975,-33.815) 8.975,-33.036 ; 9.135,-32.917 9.115,-32.897 8.975,-33.036 ; v1(9.439,-28.53) 9.583,-28.386 C118.1@9.583,-27.424 ; v1(9.574,-19.814) 9.583,-19.805 C113.1@9.583,-19.185 ; C119.1@9.583,-30.17 9.583,-31.811 v1(9.652,-31.881) 8.975,-32.557 8.975,-33.036 ; v1(10.287,-17.022) 10.295,-17.03 C121.1@11.176,-17.03 ; R68.2@12.581,-9.148 12.581,-8.042 v1(12.55,-8.011) 12.581,-7.98 R67.2@12.581,-6.671 R66.2@12.581,-4.195 ; v1(14.089,-37.047) 14.089,-36.334 v1(14.097,-36.326) 14.097,-35.834 14.319,-35.612 C161.1@14.655,-35.612 ; v1@14.982,-17.062 v1@14.986,-17.067 ; C129.1@17.899,-29.976 17.907,-29.968 17.907,-29.377 ; v1(26.263,-47.483) 26.263,-46.885 C151.1@26.281,-46.867 ; v1(34.22,-64.921) 34.242,-64.899 J7.80@34.242,-63.459 ; v1(34.22,-60.491) 34.242,-60.469 J7.79@34.242,-59.059 ; J6.80@34.242,-10.04 34.242,-8.328 34.248,-8.322 34.242,-8.317 J6.79@34.242,-5.64 ; C58.1@34.554,-32.043 34.58,-32.069 34.961,-31.687 v1(35.77,-31.687) ; C33.1@34.748,-28.952 C33.1@34.798,-28.952 ; C33.1@34.79,-28.96 C33.1@34.798,-28.952 ; v1(35.204,-42.306) 35.684,-42.306 R127.2@35.695,-42.295 ; v1(35.77,-29.287) 35.485,-29.002 34.848,-29.002 C33.1@34.798,-28.952 ; 36.592,-7.714 36.643,-7.765 36.643,-8.751 36.642,-8.752 J6.74@36.642,-10.04 ; J7.73@36.642,-59.059 36.642,-61.03 v1(36.703,-61.091) ; 36.642,-7.714 J6.73@36.642,-5.64 ; v1(38.665,-57.44) 39.042,-57.817 J7.67@39.042,-59.059 ; v1@39.042,-61.854 J7.68@39.042,-63.459 J7.66@39.842,-63.459 ; J6.68@39.042,-10.04 39.042,-8.375 39.037,-8.37 39.042,-8.365 J6.67@39.042,-5.64 ; C52.1@39.477,-25.298 39.477,-25.63 v1(39.841,-25.994) ; v1@39.842,-61.854 J7.66@39.842,-63.459 ; v1(40.641,-65.065) J7.64@40.642,-63.459 ; v1(41.38,-29.276) 41.385,-29.272 42.114,-29.272 C64.1@42.164,-29.222 ; v1(41.404,-8.217) 41.404,-10.002 J6.62@41.442,-10.04 ; v1(41.404,-8.217) 41.405,-7.288 v1(41.46,-7.232) ; R76.1@41.417,-23.11 42.582,-23.11 v1(42.682,-23.21) ; J7.61@41.442,-59.059 v1@41.442,-57.454 ; v1@41.442,-7.232 J6.61@41.442,-5.64 ; v1@42.697,-23.224 42.726,-23.195 v1(43.257,-23.195) 43.265,-23.203 43.969,-23.203 44.019,-23.253 C61.1@44.069,-23.253 ; C40.1@42.772,-37.187 42.965,-36.993 v1(42.965,-36.527) ; v1@43.18,-61.726 43.18,-61.834 43.042,-61.972 J7.58@43.042,-63.459 ; v1(43.77,-57.183) 43.842,-57.255 J7.55@43.842,-59.059 ; v1@43.833,-8.193 43.87,-8.156 v1(43.87,-7.234) ; J6.56@43.837,-10.035 v1(43.837,-8.193) ; v1(43.843,-61.853) J7.56@43.842,-63.459 J7.58@43.042,-63.459 ; J6.55@43.842,-5.64 43.882,-5.68 v1@43.882,-7.234 ; v1(44.57,-32.532) 44.57,-32.943 C44.1@44.723,-33.095 ; v1(46.226,-57.594) 46.242,-57.609 J7.49@46.242,-59.059 ; J6.50@46.242,-10.04 46.242,-8.124 46.119,-8.001 46.119,-7.524 46.242,-7.401 J6.49@46.242,-5.64 ; v1(48.513,-33.404) 48.513,-34.157 C79.1@48.522,-34.167 ; v1(48.641,-61.853) 48.642,-61.854 J7.44@48.642,-63.459 ; J7.43@48.642,-59.059 v1@48.642,-57.454 ; J6.44@48.642,-10.04 48.642,-8.514 48.641,-8.513 v1(48.641,-8.193) 48.641,-7.788 48.756,-7.673 v1(48.756,-7.268) ; J6.43@48.642,-5.64 48.777,-5.775 v1@48.777,-7.268 ; v1(49.365,-39.716) 49.396,-39.686 50.115,-39.686 C69.1@50.165,-39.636 ; v1(50.927,-6.735) 51.042,-6.62 J6.37@51.042,-5.64 ; v1@50.941,-6.748 51.087,-6.895 51.087,-8.031 v1(50.941,-8.178) 51.052,-8.29 51.052,-8.704 51.042,-8.714 J6.38@51.042,-9.611 ; v1@51.042,-61.854 J7.38@51.042,-63.459 51.054,-63.471 51.054,-63.504 51.099,-63.459 J7.36@51.842,-63.459 J7.34@52.642,-63.459 ; J7.37@51.042,-59.059 v1@51.042,-57.454 ; v1(52.643,-65.065) J7.34@52.642,-63.459 ; R96.2@52.959,-31.508 54.09,-31.508 54.115,-31.483 54.291,-31.66 v1(54.603,-31.66) 54.721,-31.66 U13.3@54.721,-31.789 ; C106.2@53.213,-14.855 53.263,-14.805 54.033,-14.805 v1(54.102,-14.736) ; J7.31@53.442,-59.059 v1@53.442,-57.454 ; J6.32@53.442,-10.04 53.442,-8.423 53.436,-8.416 53.437,-8.415 53.437,-7.719 53.442,-7.714 J6.31@53.442,-5.64 ; v1(53.721,-61.599) 53.442,-61.878 J7.32@53.442,-63.459 ; C109.2@54.422,-17.181 54.472,-17.131 54.472,-16.754 v1(54.803,-16.423) ; v1(54.737,-33.786) 54.737,-34.038 54.999,-34.3 C110.1@54.999,-34.35 ; v1@55.833,-7.966 55.842,-7.975 J6.26@55.842,-10.04 ; v1@55.838,-7.894 v1@55.838,-7.232 ; J7.25@55.842,-59.059 v1(55.842,-57.573) v1(56.261,-57.154) ; J6.25@55.842,-5.64 55.842,-7.218 v1(55.857,-7.232) ; v1(56.184,-16.523) 56.198,-16.523 C105.2@56.796,-17.121 ; v1(56.641,-61.853) J7.24@56.642,-63.459 ; v1(57.441,-61.853) J7.22@57.442,-63.459 ; C108.2@57.658,-12.069 57.658,-12.019 57.708,-11.969 58.571,-11.969 v1(58.581,-11.958) ; v1@58.233,-7.966 58.242,-7.975 J6.20@58.242,-10.04 ; v1@58.238,-7.894 v1@58.238,-7.232 ; J7.20@58.242,-63.459 J7.22@57.442,-63.459 ; J7.19@58.242,-59.059 v1@58.242,-57.454 ; J6.19@58.242,-5.64 58.242,-7.218 v1(58.257,-7.232) ; v1(60.579,-61.726) 60.642,-61.789 J7.14@60.642,-63.459 ; v1@60.633,-7.966 60.642,-7.975 J6.14@60.642,-10.04 ; v1@60.638,-7.894 v1@60.638,-7.232 ; J7.13@60.642,-59.059 v1@60.642,-57.454 ; J6.13@60.642,-5.64 60.642,-7.218 v1(60.657,-7.232) ; v1(62.23,-22.864) 62.357,-22.864 62.397,-22.824 64.422,-22.824 64.389,-22.856 v1(64.389,-23.372) ; C100.1@62.865,-39.485 62.881,-39.501 v1(63.5,-39.501) ; v1@63.033,-7.966 63.042,-7.975 J6.8@63.042,-10.04 ; v1@63.038,-7.894 v1@63.038,-7.232 ; J6.7@63.042,-5.64 63.042,-7.218 v1(63.057,-7.232) ; v1(63.754,-48.645) 64.508,-48.645 C97.1@64.516,-48.637 64.516,-49.534 65.024,-50.042 U9.5@66.49,-50.042 ; v1(65.151,-18.419) 65.159,-18.427 C184.1@65.864,-18.427 68.384,-18.427 68.757,-18.8 69.596,-18.8 ; v1@65.433,-7.966 65.442,-7.975 J6.2@65.442,-10.04 ; v1@65.438,-7.894 v1@65.438,-7.232 ; J7.2@65.442,-63.459 65.442,-60.633 v1(65.432,-60.623) 65.442,-60.613 J7.1@65.442,-59.059 ; J6.1@65.442,-5.64 65.442,-7.218 v1(65.457,-7.232) ; v1(65.786,-41.787) 66.286,-41.787 C103.2@66.294,-41.779 ; v1(65.913,-39.755) U11.3@65.913,-39.501 ; v1(67.056,-32.512) 67.064,-32.504 C92.1@67.064,-31.496 ; R46.1@67.564,-38.265 67.605,-38.265 v1(67.605,-38.951) ; R48.1@68.58,-42.541 68.588,-42.549 v1(69.596,-42.549) ; v1(68.652,-21.819) 68.757,-21.925 69.242,-21.925 69.292,-21.975 C180.1@69.342,-21.975 ; C180.1@69.392,-21.975 69.85,-21.517 69.85,-21.213 ; v1(71.228,-43.475) 71.23,-43.475 71.883,-44.127 C85.1@71.954,-44.127 ; C8.1@79.002,-66.675 79.002,-65.706 v1(79.015,-65.693) ; C9.1@82.415,-65.282 v1(83.249,-65.282) R8.1@84.082,-65.282 ; v1(87.276,-39.844) 87.276,-40.055 87.569,-40.348 87.945,-40.348 C195.1@87.995,-40.398 ; C94.1@88.138,-56.654 cw(c89.384,-57.899) v1(89.384,-56.138) C93.1@90.051,-56.138 ; v1(90.117,-38.862) D16.A@90.809,-38.862 ; D16.A@90.805,-38.866 D16.A@90.809,-38.862 ; v1(90.805,-34.548) D17.A@90.805,-35.191 91.853,-35.191 v1(91.861,-35.183) 92.547,-35.869 J5.5@92.598,-35.869 ; D16.A@90.856,-38.866 90.852,-38.862 D16.A@90.809,-38.862 ; v1(91.506,-38.85) 90.821,-38.85 D16.A@90.809,-38.862 ; v1(92.202,-45.216) 92.202,-44.589 D9.A@92.21,-44.581 92.202,-44.573 v1(92.202,-43.819) ; v1(95.742,-45.216) 95.742,-44.589 D10.A@95.75,-44.581 95.742,-44.573 v1(95.742,-43.819) ; J7.66@39.842,-63.459 J7.64@40.642,-63.459 ; J7.64@40.642,-63.459 J7.62@41.442,-63.459 J7.60@42.242,-63.459 J7.58@43.042,-63.459 ; J7.34@52.642,-63.459 J7.32@53.442,-63.459 ; J7.32@53.442,-63.459 J7.30@54.242,-63.459 J7.28@55.042,-63.459 J7.26@55.842,-63.459 J7.24@56.642,-63.459 ; J7.24@56.642,-63.459 J7.22@57.442,-63.459
  L10(SIG) w0.508: v1(16.891,-17.149) 17.251,-17.509 C114.1@17.653,-17.509 ; C122.1@19.185,-16.26 19.231,-16.306 19.231,-16.822 v1(19.431,-17.022) ; C78.1@41.129,-38.97 41.175,-39.016 41.175,-39.537 v1(41.365,-39.727) ; v1(41.783,-18.546) 41.691,-18.638 41.691,-19.994 41.145,-20.54 41.691,-21.086 41.691,-21.106 v1(42.418,-21.106) ; C68.1@48.106,-39.147 48.106,-39.212 48.553,-39.659 v1(48.553,-39.715) ; C107.2@51.625,-14.855 C106.2@53.213,-14.855 ; v1(80.691,-36.09) 81.371,-36.09 C194.1@81.399,-36.062 ; 86.106,-39.374 86.175,-39.374 86.691,-39.89 86.791,-39.89 86.837,-39.844 v1(87.276,-39.844) ; v1@90.297,-41.406 91.051,-41.406 C196.1@91.059,-41.398 91.067,-41.406 v1(91.821,-41.406)
  L10(SIG) w0.6: v1(30.275,-24.239) 30.275,-24.569 31.087,-25.381 C99.2@31.137,-25.381
  L10(SIG) w0.635: C194.1@81.399,-36.062 82.171,-36.062 82.172,-36.061
  L10(SIG) w0.75: X2.2@34.703,-24.928 v1(34.703,-24.225)
  L10(SIG) w0.8: v1(69.599,-8.262) C67.1@71.374,-8.262 71.377,-8.259 v1(73.095,-8.259) ; v1(74.908,-22.11) 75.194,-22.395 C179.1@75.194,-23.646 75.194,-24.012 75.184,-24.022 75.184,-24.801 75.194,-24.811 C178.1@75.194,-25.225 ; v1(82.042,-33.278) 82.042,-31.757 C60.1@82.045,-31.754
  other v1: 24.892,-66.802 26.924,-66.802 29.21,-66.802 32.004,-66.802 35.56,-66.802 38.61,-66.743 40.642,-66.743 42.928,-66.743 46.484,-66.743 49.278,-66.743 50.802,-66.743 53.596,-66.743 57.152,-66.743 63.246,-66.04 65.534,-65.981 67.566,-65.981 76.202,-65.981 57.404,-65.278 61.43,-64.906 15.689,-64.768 22.039,-64.514 65.788,-64.203 67.82,-64.203 70.106,-64.203 76.456,-64.203 26.53,-64.02 30.086,-64.02 83.174,-63.321 15.689,-62.736 22.039,-62.482 26.632,-62.295 30.018,-62.294 39.043,-61.853 39.843,-61.853 51.041,-61.853 65.438,-61.552 72.263,-60.964 12.993,-60.685 19.738,-60.613 15.689,-60.45 22.039,-60.196 12.993,-59.931 81.026,-59.313 12.993,-59.177 81.03,-58.698 12.993,-58.423 72.898,-58.424 81.026,-58.043 12.993,-57.67 15.689,-57.656 73.533,-57.662 41.443,-57.453 48.643,-57.453 51.043,-57.453 53.443,-57.453 58.243,-57.453 60.643,-57.453 22.039,-57.402 74.168,-57.408 12.993,-56.916 9.437,-56.875 11.215,-56.875 40.767,-56.646 88.773,-56.265 9.437,-56.121 11.215,-56.121 58.928,-56.138 6.35,-56.011 76.454,-56.011 42.164,-55.884 24.257,-55.63 9.437,-55.367 11.215,-55.367 58.928,-55.376 27.178,-55.249 76.454,-55.249 42.164,-55.122 24.257,-54.868 11.215,-54.613 60.018,-54.535 60.706,-54.535 61.468,-54.535 58.928,-54.487 77.47,-54.408 78.232,-54.408 78.994,-54.408 44.031,-54.37 76.454,-54.36 43.18,-54.281 44.704,-54.281 42.164,-54.233 27.178,-54.069 25.273,-54.027 26.035,-54.027 24.257,-53.979 11.215,-53.86 15.748,-53.848 22.039,-53.846 58.928,-53.598 76.454,-53.471 42.164,-53.344 4.813,-53.12 6.083,-53.12 7.099,-53.12 9.437,-53.106 11.215,-53.106 24.257,-53.09 27.178,-52.89 29.58,-52.908 58.928,-52.836 76.454,-52.709 42.164,-52.582 24.257,-52.328 6.92,-52.201 58.928,-51.947 76.454,-51.82 27.178,-51.711 42.164,-51.693 6.92,-51.447 24.257,-51.439 6.92,-50.693 27.178,-50.531 6.92,-49.939 29.598,-49.47 27.178,-49.397 6.92,-49.185 6.92,-48.431 27.178,-48.381 4.813,-47.278 14.477,-46.938 9.398,-44.581 7.63,-42.858 48.445,-42.532 19.171,-42.406 47.472,-42.243 82.813,-42.04 49.548,-41.888 19.748,-41.524 90.399,-41.449 7.079,-41.243 9.481,-41.081 23.546,-41.097 78.984,-41.053 11.959,-41.025 15.906,-41.004 52.331,-40.12 53.603,-40.107 70.361,-40.044 16.861,-40.008 54.998,-39.543 70.358,-39.501 80.502,-39.351 50.8,-38.993 84.138,-38.993 85.471,-38.993 46.965,-38.927 38.152,-38.905 10.186,-38.866 12.69,-38.698 54.775,-38.594 5.08,-38.485 32.766,-38.358 44.565,-38.127 79.038,-38.065 82.868,-37.507 84.109,-37.512 85.344,-37.469 79.858,-37.372 43.765,-37.327 30.58,-37.129 50.801,-37.085 59.797,-36.751 77.724,-36.58 32.938,-36.545 30.606,-36.529 84.138,-36.326 85.471,-36.326 82.849,-36.237 7.43,-35.945 49.365,-35.713 51.332,-35.573 78.994,-35.183 31.877,-34.802 51.816,-34.802 30.385,-34.675 7.43,-34.385 29.718,-33.786 6.683,-33.635 5.067,-33.582 31.055,-33.55 42.177,-33.273 26.797,-32.135 31.697,-31.333 9.578,-30.983 17.526,-30.992 28.472,-30.866 15.064,-30.303 72.936,-29.13 68.598,-28.235 18.863,-28.118 72.02,-28.082 14.155,-27.261 14.053,-26.438 15.481,-26.426 13.825,-24.743 26.144,-24.733 41.807,-24.603 43.413,-24.483 21.475,-24.441 46.33,-24.416 14.883,-24.302 44.969,-24.289 19.516,-24.108 17.385,-23.936 16.327,-23.839 12.442,-23.213 20.446,-22.394 5.021,-22.35 7.679,-22.1 18.871,-20.544 5.021,-20.318 27.94,-19.812 24.906,-19.341 31.539,-19.263 26.162,-19.05 28.702,-18.796 7.679,-18.544 24.596,-18.067 5.021,-18.032 62.737,-17.988 61.893,-17.515 29.025,-16.749 38.101,-16.365 40.133,-16.365 74.021,-15.995 7.679,-15.75 5.021,-15.238 69.719,-15.059 71.278,-14.874 8.892,-14.673 10.924,-14.673 13.21,-14.673 16.004,-14.673 19.56,-14.673 24.638,-14.355 23.961,-14.269 70.313,-14.105 64.135,-14.092 66.912,-14.092 72.517,-14.101 75.057,-14.101 7.679,-13.464 25.433,-13.157 37.973,-13.085 40.005,-13.085 6.856,-12.505 10.412,-12.505 13.206,-12.505 15.492,-12.505 17.524,-12.505 71.374,-11.815 73.787,-11.811 23.996,-11.72 5.021,-11.682 76.708,-11.557 7.679,-11.432 83.058,-10.16 85.852,-10.033 34.248,-8.193 36.637,-8.193 39.037,-8.193 46.237,-8.193 53.436,-8.193 55.833,-7.872 58.233,-7.872 60.633,-7.872 63.033,-7.872 65.433,-7.872 34.271,-7.232 36.592,-7.232 39.06,-7.232 46.277,-7.232 53.46,-7.232 18.155,-6.308 14.599,-6.221 14.472,-5.832 18.282,-5.832 12.573,-5.465 18.282,-5.324 14.472,-5.197
  other v2: 89.003,-67.22 89.003,-66.22 90.003,-66.22 89.003,-65.22 90.003,-65.22 89.003,-64.22 90.003,-64.22 89.003,-63.22 90.003,-63.22 91.003,-62.22 91.003,-61.22 92.003,-61.22 91.003,-60.22 92.003,-60.22 93.003,-60.22 94.003,-60.22 95.003,-60.22 96.003,-60.22 91.003,-59.22 92.003,-59.22 93.003,-59.22 94.003,-59.22 95.003,-59.22 96.003,-59.22 92.003,-58.22 93.003,-58.22 94.003,-58.22 95.003,-58.22 96.003,-58.22 63.003,-57.22 64.003,-57.22 65.003,-57.22 66.003,-57.22 67.003,-57.22 68.003,-57.22 69.003,-57.22 70.003,-57.22 71.003,-57.22 72.003,-57.22 76.003,-57.22 92.003,-57.22 93.003,-57.22 94.003,-57.22 95.003,-57.22 64.003,-56.22 65.003,-56.22 66.003,-56.22 82.003,-56.22 83.003,-56.22 84.003,-56.22 94.003,-56.22 95.003,-56.22 64.003,-55.22 65.003,-55.22 66.003,-55.22 74.003,-55.22 82.003,-55.22 83.003,-55.22 84.003,-55.22 89.003,-55.22 90.003,-55.22 91.003,-55.22 92.003,-55.22 93.003,-55.22 95.003,-55.22 65.003,-54.22 66.003,-54.22 74.003,-54.22 82.003,-54.22 83.003,-54.22 84.003,-54.22 89.003,-54.22 90.003,-54.22 92.003,-54.22 93.003,-54.22 94.003,-54.22 96.003,-54.22 10.003,-7.22 11.003,-7.22 12.003,-7.22 15.003,-7.22 10.003,-6.22 11.003,-6.22 12.003,-6.22 10.003,-5.22 11.003,-5.22 12.003,-5.22 10.003,-4.22 11.003,-4.22
  other v3: 70.886,-20.295 71.986,-20.295 73.086,-20.295 70.886,-19.195 71.986,-19.195 73.086,-19.195 70.886,-18.095 71.986,-18.095 73.086,-18.095
  other v4: 23.582,-42.263 23.682,-40.695 23.562,-40.305 30.636,-37.907 16.69,-25.371 61.342,-14.006
LED_DONE_A: D8.A R39.2 | length 1.7
  L1(SIG) w0.2: R39.2@44.315,-43.819 44.319,-43.823 44.319,-45.466 D8.A@44.323,-45.47
LED_DONE_K: D8.K Q2.D | length 4.9
  L1(SIG) w0.2: Q2.D@38.608,-45.708 38.751,-45.851 39.37,-45.851 39.751,-45.47 D8.K@43.323,-45.47
LED_PL: R99.2 R100.1 U7.T12 | length 14.8
  L1(SIG) w0.1: v1(42.97,-38.109) U7.T12@43.37,-37.71 ; R99.2@47.371,-48.526 R100.1@48.768,-48.526 v1(48.768,-47.756)
  L6(SIG) w0.1: v1(42.97,-38.109) 42.97,-38.529 44.45,-40.009 44.45,-41.152 48.768,-45.47 v1(48.768,-47.756)
LED_PL_A: D14.A R97.2 | length 1.7
  L1(SIG) w0.1: D14.A@40.648,-48.391 40.712,-48.327 40.712,-46.803 R97.2@40.775,-46.74
LED_PL_K: D14.K Q4.D | length 2
  L1(SIG) w0.1: D14.K@41.648,-48.391 42.164,-48.391 42.545,-48.772 Q4.D@43.45,-48.772
LED_PS_A: D13.A R78.2 | length 1.7
  L1(SIG) w0.2: R78.2@28.694,-12.704 28.758,-12.767 28.758,-14.291 D13.A@28.821,-14.355
LED_PS_K: D13.K Q3.D | length 2.9
  L1(SIG) w0.2: Q3.D@26.908,-16.514 27.569,-16.514 27.821,-16.261 D13.K@27.821,-14.355
LED_PWR_A: D2.A R22.1 | length 1.4
  L1(SIG) w0.2: R22.1@83.728,-59.864 R22.1@83.685,-59.821 D2.A@84.971,-59.821 D2.A@85.014,-59.864
LED_PWR_K: D2.K Q1.S | length 6.3
  L1(SIG) w0.2: Q1.S@85.83,-64.123 85.969,-64.262 86.36,-64.262 87.122,-63.5 87.122,-60.198 86.868,-59.944 86.094,-59.944 D2.K@85.971,-59.821
M0: R63.2 R68.1 SW2.1 | length 23.6
  L1(SIG) w0.2: v1(32.131,-16.768) 32.135,-16.764 33.397,-16.764 R63.2@33.401,-16.76
  L10(SIG) w0.2: R68.1@13.581,-9.148 SW2.1@16.663,-9.148 16.968,-8.843 18.11,-8.843 26.539,-17.272 31.627,-17.272 v1(32.131,-16.768)